# Altium PCB pcb_tigresse_experiment.PcbDoc
Units mil, origin at the board's own origin, x right, y up, seen from the top; angles counter-clockwise.
Board outline 6000 x 4000 mil, 2 copper layers (Top Layer, Bottom Layer); 37 components, 39 nets, 139 pads, 0 vias.
Unrouted connection lines stored in the file: 78.
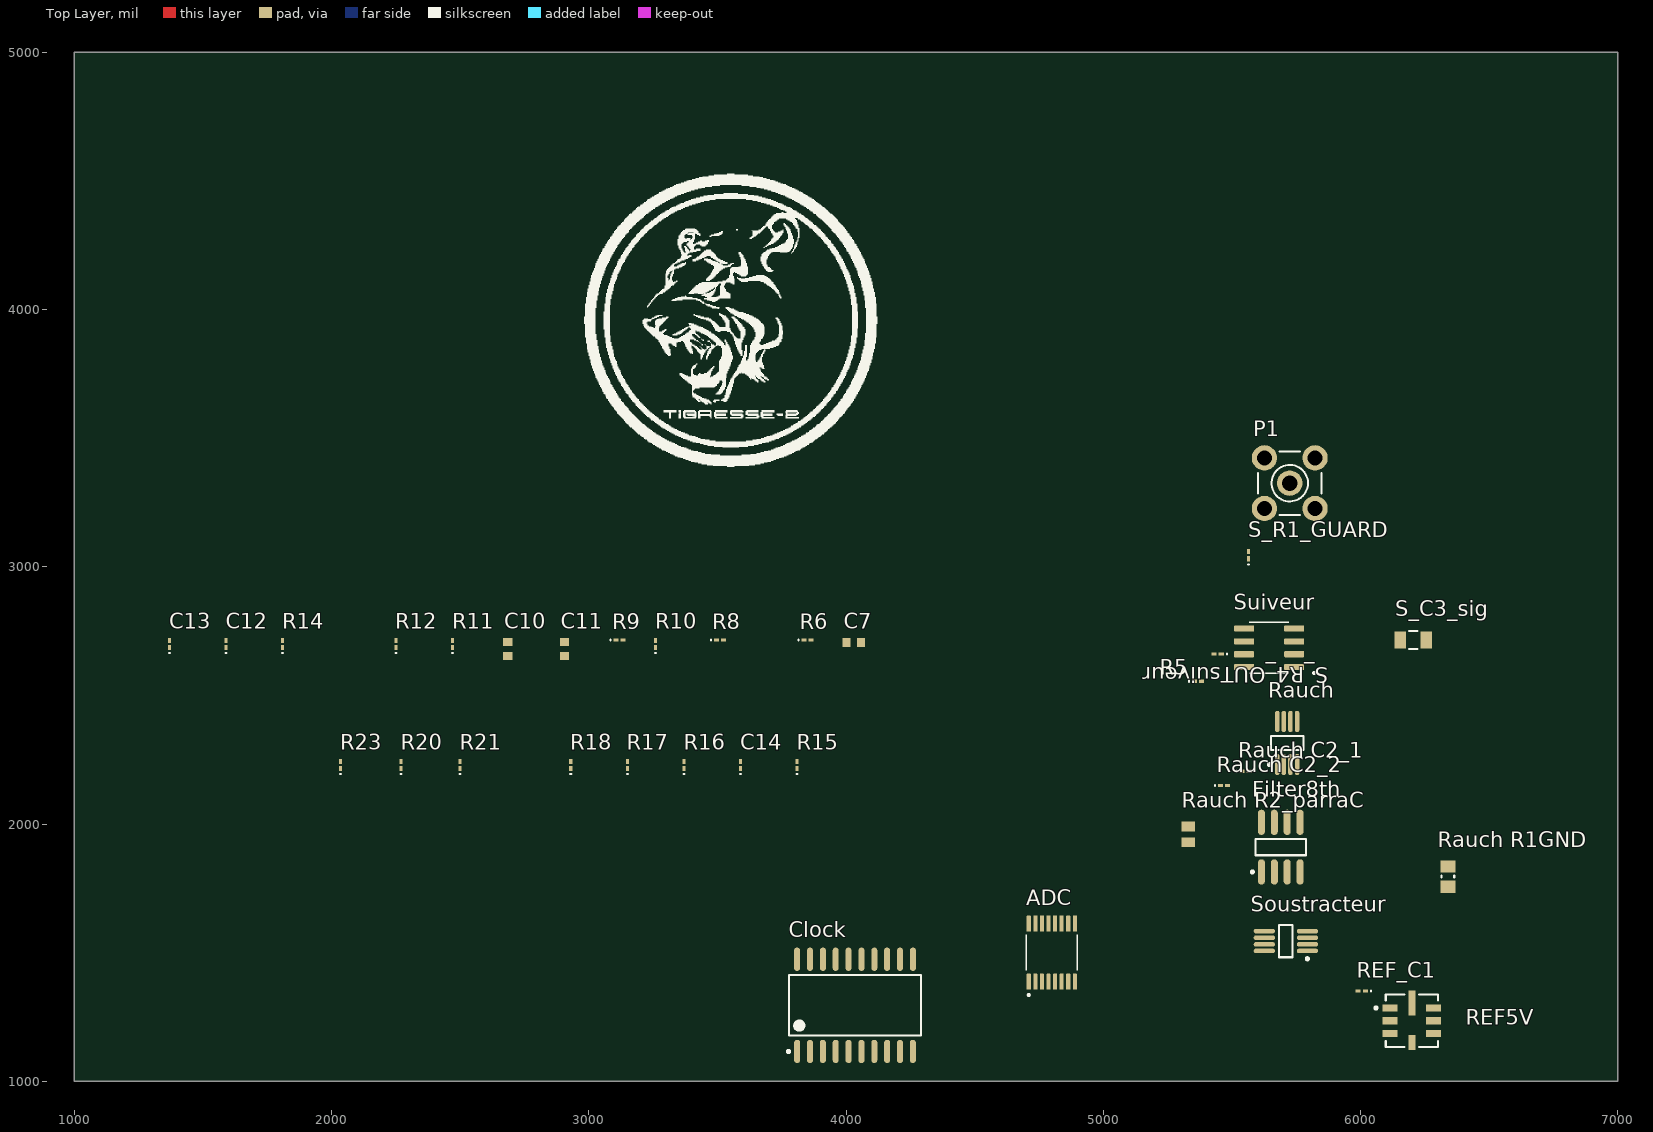
[diagram p0: Top Layer view]
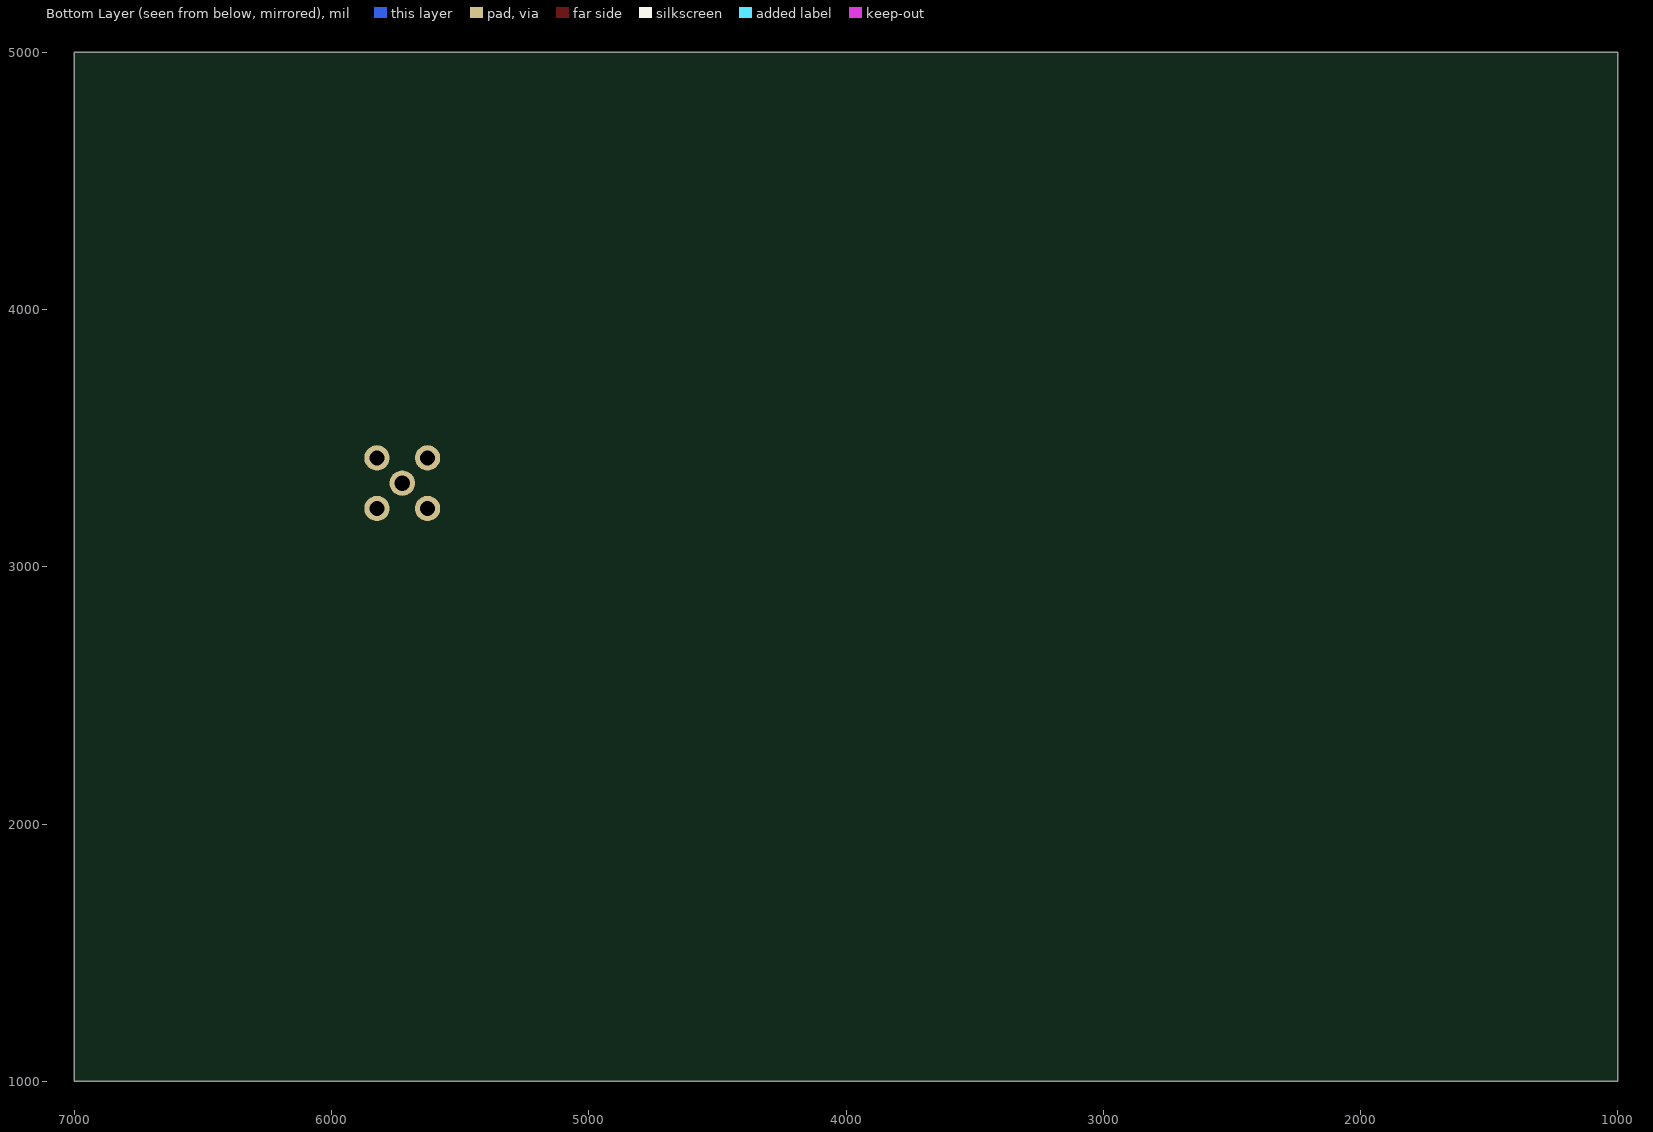
[diagram p1: Bottom Layer view, seen from below]

## Layer stack, top to bottom
Top Solder: solder mask 0.4, Solder Resist, Dk 3.5
Top Layer: signal copper 1.4
Dielectric 1: dielectric 12.6, FR-4, Dk 4.8
Bottom Layer: signal copper 1.4
Bottom Solder: solder mask 0.4, Solder Resist, Dk 3.5

## Board outline
1000,1000 7000,1000 7000,5000 1000,5000

## Design rules (kind name [scope] priority, off if disabled: settings)
Clearance [All] p1: gap=10 ignorepadtopadclearanceinfootprint=FALSE except(0: Arc-Hole Track-Hole SMDPad-Hole THPad-Hole Via-Hole Fill-Hole Poly-Hole Region-Hole Text-Hole)
PolygonConnect [All] p1: connectstyle=Relief reliefconductorwidth=10 reliefentries=4 polygonreliefangle="90 Angle" airgapwidth=10
RoutingVias [All] p1: holewidth=28 width=50 viastyle="Through Hole" minholewidth=28 minwidth=50 maxholewidth=28 maxwidth=50
SolderMaskExpansion [All] p1: expansion=4 istentingtop=FALSE
Width [All] p1: maxlimit=50 minlimit=6 preferedwidth=12 minimp=50.000000 maximp=50.000000 favimp=50.000000
30 further rules are at their usual default settings.

## Classes and differential pairs
component class Pamp: ADC C2 C4 C7 C8 C9 C10 C11 C12 C13 D1 D2 Filter8th P1 R5 R6 R8 R9 R10 R11 R12 R14 Rauch "Rauch C2_1" "Rauch C2_2" "Rauch R1GND" "Rauch R2_parraC" REF5V REF_C1 S_C3_sig S_R1_GUARD S_R4_OUTsuiveur Soustracteur Suiveur
component class Data: BT1 C14 C15 Clock D3 R15 R16 R17 R18 R20 R21 R23 U7

## Components (designator, comment, footprint, x,y, rotation, side; value= is the part's Value field where it differs from the comment)
ADC "ADS122U04IPWR" SOP65P640X120-16N 4800,1500 r90 top
C7 "NPO/25V" 1608[0603] 4030,2705 r0 top value=3.9nF
C10 "NPO/25V" 1608[0603] 2685,2680 r90 top value=2.6nF
C11 "NPO/25V" 1608[0603] 2905,2680 r90 top value=3.9nF
C12 "X7R 50V" 0603 1590,2700 r90 top value=100nF
C13 "X7R 50V" 0603 1370,2700 r90 top value=100nF
C14 "C0603" 0603 3590,2230 r90 top value=10nF/10V
Clock "DS3232SN#" W20#H2_N 4035,1295 r90 top
Filter8th "MAX295CSA" MAXM-S8-5_M 5690,1910 r90 top
P1 "SMA" SMB_V-RJ45 5725,3325 r0 top
R5 "Res CMS" 0603 5368.78,2555 r0 top value=150
R6 "" 0603 3850,2715 r0 top value=150K/1%
R8 "" 0603 3510,2715 r0 top value=100K/1%
R9 "" 0603 3120,2715 r0 top value=100K/1%
R10 "" 0603 3260,2700 r90 top value=100K/1%
R11 "" 0603 2470,2700 r90 top value=240K/1%
R12 "" 0603 2250,2700 r90 top value=270K/1%
R14 "" 0603 1810,2700 r90 top value=120K/1%
R15 "Res CMS" 0603 3810,2230 r90 top value=1M
R16 "Res CMS" 0603 3370,2230 r90 top value=91K
R17 "Res CMS" 0603 3150,2230 r90 top value=47R
R18 "Res CMS" 0603 2930,2230 r90 top value=47R
R20 "Res CMS" 0603 2270,2230 r90 top value=4K7
R21 "Res CMS" 0603 2500,2230 r90 top value=4K7
R23 "Res CMS" 0603 2035,2230 r90 top value=47R
Rauch "AD8642ARMZ" ADI-RM-8_M 5715,2315 r90 top
"Rauch C2_1" "X7R 16V" 0603 5553.78,2205 r0 top value=22nF
"Rauch C2_2" "X7R 25V" 0603 5470,2150 r0 top value=120nF
"Rauch R1GND" "RC0805FR-07100KL" RESC2013X60X35ML10T20 6340,1795.63 r90 top
"Rauch R2_parraC" "ERJ-6ENF2003V" RESC2013X70X40LL20T20 5330,1960 r90 top
REF5V "LTC6655CHLS8-4.096#PBF" FP-LS8-8-05-08-1852-MFG 6199.65,1235 r0 top
REF_C1 "X7R 50V" 0603 6005,1350 r180 top value=100nF
S_C3_sig "CL31C221JGFNNNF" FP-CL31-IPC_C 6205.25,2715 r180 top
S_R1_GUARD "Res CMS" 0603 5565,3045 r90 top value=100K
S_R4_OUTsuiveur "Res CMS" 0603 5445,2660 r180 top value=1K
Soustracteur "AD8642ARMZ" ADI-RM-8_M 5710,1545 r180 top
Suiveur "ADA4530-1" SOIC127P600X175-8N 5645,2685 r180 top

## Footprints (in the part's own frame and the unit in brackets; to place one, negate y for a bottom-side part, rotate by r counter-clockwise, add the part's x,y. Pads: shape width x height; smd on the part's side, far side on the other; paste and mask are expansions set on the pad)
0603 [mm] "Chip Inductor, Body 0.6x0.3mm, IPC High Density"
  rect 0.5x0.3 smd: 1(-0.35,0) 2(0.35,0)
  silkscreen extent -0.9,-0.05 -0.9,0.05, body extent -0.33,-0.18 0.33,0.18, height 0.55
1608[0603] [mm] "Chip Capacitor, Body 1.6x0.8mm, IPC High Density"
  rect 0.8x0.9 smd: 1(-0.7,0) 2(0.7,0)
  body extent -0.87,-0.48 0.87,0.48, height 1.3
ADI-RM-8_M [mm] "SOP, 8-Leads, Body 3x3mm, Pitch 0.65mm, IPC Low Density"
  oval 2.1x0.45 smd: 1(-2.125,0.975) 2(-2.125,0.325) 3(-2.125,-0.325) 4(-2.125,-0.975) 5(2.125,-0.975) 6(2.125,-0.325) 7(2.125,0.325) 8(2.125,0.975)
  silkscreen extent -2.25,-1.6 0.67,1.87, body extent -1.6,-1.6 1.6,1.6, height 1.1
FP-CL31-IPC_C [mil]
  rect 43.52x65.28 smd paste+0 mask+0: 1(-50.25,0) 2(50.25,0)
  silkscreen extent -17,-34 17,34, body extent -76,-38 76,38, height 10
FP-LS8-8-05-08-1852-MFG [mm]
  rect 1.5x0.7 smd paste+0 mask+0: 1(-2.15,1.27) 2(-2.15,0) 3(-2.15,-1.27) 5(2.15,-1.27) 6(2.15,0) 7(2.15,1.27)
  rect 0.7x1.5 smd paste+0 mask+0: 4(0,-2.15)
  rect 0.7x2.5 smd paste+0 mask+0: 8(0,1.75)
  silkscreen extent -3.67,-2.58 2.58,2.58, body extent -3,-3 3,3.1, height 0.25
MAXM-S8-5_M [mm] "SOIC, 8-Leads, Body 4.9x3.9mm, Pitch 1.27mm, IPC Low Density"
  oval 2.5x0.7 smd: 1(-2.45,1.905) 2(-2.45,0.635) 3(-2.45,-0.635) 4(-2.45,-1.905) 5(2.45,-1.905) 6(2.45,-0.635) 7(2.45,0.635) 8(2.45,1.905)
  silkscreen extent -2.57,-2.5 0.8,2.93, body extent -2,-2.5 2,2.5, height 1.75
RESC2013X60X35ML10T20 [mm] "Chip Resistor, 2-Leads, Body 2.1x1.35mm, IPC Low Density"
  rect 1.2x1.45 smd: 1(-1,0) 2(1,0)
  silkscreen extent -0.1,-0.63 0.1,0.63, body extent -1.05,-0.68 1.05,0.67, height 0.6
RESC2013X70X40LL20T20 [mm] "Chip Resistor, 2-Leads, Body 2.00x1.25mm, IPC High Density"
  rect 0.95x1.35 smd: 1(-0.775,0) 2(0.775,0)
  body extent -1.1,-0.72 1.1,0.72, height 0.7
SMB_V-RJ45 [mm] "Connector; SMB Straight"
  round 2.5 hole 1.5: 1(0,0) 2(-2.5,-2.5) 2(-2.5,2.5) 2(2.5,-2.5) 2(2.5,2.5)
  silkscreen extent -3.15,-3.15 3.15,3.15
SOIC127P600X175-8N [mm]
  rrect25% 1.97x0.6 smd: 1(-2.475,1.905) 2(-2.475,0.635) 3(-2.475,-0.635) 4(-2.475,-1.905) 5(2.475,-1.905) 6(2.475,-0.635) 7(2.475,0.635) 8(2.475,1.905)
  silkscreen extent -4.54,-2.52 1.95,2.6, body extent -2.45,-3 2.45,3, height 0.75
SOP65P640X120-16N [mm]
  rrect25% 1.57x0.41 smd: 1(-2.87,2.275) 2(-2.87,1.625) 3(-2.87,0.975) 4(-2.87,0.325) 5(-2.87,-0.325) 6(-2.87,-0.975) 7(-2.87,-1.625) 8(-2.87,-2.275) 9(2.87,-2.275) 10(2.87,-1.625) 11(2.87,-0.975) 12(2.87,-0.325) 13(2.87,0.325) 14(2.87,0.975) 15(2.87,1.625) 16(2.87,2.275)
  silkscreen extent -4.29,-2.5 1.77,2.5
W20#H2_N [mm] "SOIC, 20-Leads, Body 12.8x7.5mm, Pitch 1.27mm, IPC Medium Density"
  oval 2.3x0.6 smd: 1(-4.55,5.715) 2(-4.55,4.445) 3(-4.55,3.175) 4(-4.55,1.905) 5(-4.55,0.635) 6(-4.55,-0.635) 7(-4.55,-1.905) 8(-4.55,-3.175) 9(-4.55,-4.445) 10(-4.55,-5.715) 11(4.55,-5.715) 12(4.55,-4.445) 13(4.55,-3.175) 14(4.55,-1.905) 15(4.55,-0.635) 16(4.55,0.635) 17(4.55,1.905) 18(4.55,3.175) 19(4.55,4.445) 20(4.55,5.715)
  silkscreen extent -4.67,-6.5 3,6.69, body extent -3.8,-6.5 3.8,6.5, height 2.65

## Part data
ADC: Package=None, Availability=Unavailable, MP=ADS122U04IPWR, Price=None
C7 C10 C11: library part "Cap Semi", "Capacitor (Semiconductor SIM Model)", LatestRevisionDate=29-May-2009, LatestRevisionNote="IPC-7351 Footprint Added.", PackageDescription="Chip Capacitor", PackageReference=C1206, Published=8-Jun-2000, Publisher="Altium Limited"
C12 C13 "Rauch C2_1" "Rauch C2_2" REF_C1: library part "Cap CMS", "Capacitor (Semiconductor SIM Model)", LatestRevisionDate=29-May-2009, LatestRevisionNote="IPC-7351 Footprint Added.", PackageDescription="Chip Capacitor", PackageReference=C1206, Published=8-Jun-2000, Publisher="Altium Limited"
C14: "Ceramic Chip Capacitor - Standard", PackageDocument=Mar-2001, Code_IPC="1608 [0603]", Code_JEITA=0603, ComponentLink1Description="Manufacturer Link", ComponentLink1URL=http://www.kemet.com/, ComponentLink2Description=Datasheet, ComponentLink2URL=http://www.kemet.com/kemet/web/homepage/kechome.nsf/vapubfilesname/F3102TA.pdf/$file/F3102TA.pdf, DatasheetDocument=Mar-2001, LatestRevisionDate=19-Mar-2004, LatestRevisionNote="Silkscreen size reduced.", Note="Footprint corresponds to dimensions for bulk cassette packaging. This case size has tightened tolerances.", PackageReference=0603, Published=17-Jul-2002, Publisher="Altium Limited"
Clock: library part CMP-0254-00381-1, "Extremely Accurate I2C-Integrated Real-Time Clock/TCXO/Crystal and SRAM, 20-Pin SO, -40 to 85 degC, RoHS Qualified", Code_IPC=SOIC127P1030-20, Code_JEDEC=MS-013-AC, ComponentLink1Description="Manufacturer URL", ComponentLink1URL=http://www.maxim-ic.com, ComponentLink2Description=Datasheet, ComponentLink2URL=http://datasheets.maxim-ic.com/en/ds/DS3232.pdf, ComponentLink3Description="Package Specification", ComponentLink3URL=http://pdfserv.maxim-ic.com/package_dwgs/21-0042.PDF, DatasheetVersion="Rev 5, Jul-2010", PackageDescription="20-Pin Small-Outline IC, Wide (0.3in), 1.27 mm Pitch, SOIC (W), RoHS Qualified", PackageReference=W20#H2, PackageVersion="revD, 2010"
Filter8th: library part CMP-0026-00196-2, "8th-Order Switched Capacitor Lowpass Filter, Butterworth, Clock Tunable, 0 to 70 degC, 8-Pin SOIC (S8-5)", Generic Part Number=MAX295, Code_JEDEC=MS012, ComponentLink1Description="Manufacturer URL", ComponentLink1URL=http://www.maximintegrated.com/, ComponentLink2Description=Datasheet, ComponentLink2URL=http://datasheets.maximintegrated.com/en/ds/MAX291-MAX296.pdf, ComponentLink3Description="Package Specification", ComponentLink3URL=http://pdfserv.maximintegrated.com/package_dwgs/21-0041.PDF, DatasheetVersion="Rev. 5", Filter Characteristic=Butterworth, Filter Class="Switched Cap", Filter Sections=1, Filter Type=Lowpass, Mounting Technology="Surface Mount", Order Per Filter Section=8, PackageDescription="8-Pin Small-Outline IC, Narrow (0.15in) (S8-5), Body 4.90 x 3.90 mm, Pitch 1.27 mm", PackageReference=S8-5, PackageVersion="Rev. D, 10/2012", PartNumber=MAX295CSA, Program Method=Clock
P1: library part SMB, "SMA 90deg ConnectorR125680000", LatestRevisionDate=17-Jul-2002, LatestRevisionNote="Re-released for DXP Platform.", Publisher="Altium Limited"
R5 R15 R16 R17 R18 R20 R21 R23 S_R1_GUARD S_R4_OUTsuiveur: "Resistor", LatestRevisionDate=17-Jul-2002, LatestRevisionNote="Re-released for DXP Platform.", PackageDescription="Axial Device, Thru-Hole; 2 Leads; 0.3 in Pin Spacing", PackageReference=AXIAL-0.3, Published=8-Jun-2000, Publisher="Altium Limited"
R6 R8 R9 R10 R11 R12 R14: library part "Res CMS", "Resistor", LatestRevisionDate=17-Jul-2002, LatestRevisionNote="Re-released for DXP Platform.", PackageDescription="Axial Device, Thru-Hole; 2 Leads; 0.3 in Pin Spacing", PackageReference=AXIAL-0.3, Published=8-Jun-2000, Publisher="Altium Limited"
Rauch Soustracteur: library part CMP-0384-01629-1, "Double Channel Very Low Input Bias Current Operational Amplifier, 3.5 MHz BW, 3 V/us SR, Industrial, 8-pin SOP (RM-8), Tube", Amplifiers Per Package=2, Generic Part Number=AD8642, Input Bias Current=250fA, Input Offset Voltage=50uV, Manufacturer="Analog Devices", Code_JEDEC=MO-187-AA, ComponentLink1Description="Manufacturer URL", ComponentLink1URL=http://www.analog.com/en/index.html, ComponentLink2Description=Datasheet, ComponentLink2URL=http://www.analog.com/static/imported-files/data_sheets/AD8641_8642_8643.pdf, ComponentLink3Description="Package Specification", ComponentLink3URL=http://www.analog.com/static/imported-files/packages/PKG_PDF/MSOP%28RM%29/RM_8.pdf, DatasheetVersion="Rev. E", Iq/Amp=290uA, Mounting Technology="Surface Mount", PackageDescription="8-Pin Mini Small Outline Package, Body 3 x 3 mm, Pitch 0.65 mm", PackageReference=RM-8, PartNumber=AD8642ARMZ, Slew Rate=3V/us, Small Signal Bandwidth=3.5MHz, V Span Max=26V, V Span Min=5V
"Rauch R1GND": library part CMP-2100-03668-1, "Chip Resistor, 100 KOhm, +/- 1%, 0.125 W, -55 to 155 degC, 0805 (2012 Metric), RoHS, Tape and Reel", Case Code (Imperial)=0805, Case Code (Metric)=2012, Manufacturer=Yageo, Max Operating Temperature=155degC, Max Power Dissipation=125mW, Min Operating Temperature=-55degC, Package Description="2-Pin Surface Mounted Device, Body 2 x 1.25 mm", Package Quantity=1, Resistance=100KOhm, Temperature Coefficient=100ppm/degreesC, Tolerance=1%, Voltage Rating=150V, Case/Package=0805, Composition=ThickFilm, Datasheet URL=http://www.yageo.com/NewPortal/yageodocoutput?fileName=/pdf/R-Chip/PYu-RC_Group_51_RoHS_L_5.pdf, Datasheet Version="Rev. 5, 10/2016", Depth=1.25mm, Height=0.024inch, Lead Free=LeadFree, Lead Pitch=0.4mm, Length=2mm, Manufacturer URL=http://www.yageo.com/, Military Standard=Not, Number of Pins=2, Number of Terminations=2, Package Reference=0805, Packaging=TapeandReel, Power Rating=125mW, REACH SVHC=Unknown, RoHSCompliant=true, Termination=SMD/SMT, Voltage Rating (DC)=150V, Width=0.049inch
"Rauch R2_parraC": library part CMP-2001-00028-1, Manufacturer=Panasonic, Part Number=ERJ-6ENF2003V
REF5V: library part CMP-09137-000020-1, "IC VREF SERIES 0.05% 8CLCC", Case/Package=CLCC, Max Operating Temperature=125°C, Min Operating Temperature=-40°C, Min Output Voltage=4.096V, Operating Supply Current=7.5mA, Output Current=5mA, Package Quantity=576, Temperature Coefficient=5ppm/°C, Tolerance=0.05%, Mount="Surface Mount", Number of Pins=8, Output Type=Fixed, Packaging=Tray, REACH SVHC="No SVHC", Reference Type=Series, Reference Voltage=4.096V, RoHS Compliant=Yes
S_C3_sig: library part CMP-13271-001211-1, "Cap Ceramic 220pF 500V C0G ±5% SMD 1206 +125°C Embossed T/R", Capacitance=220pF, Case/Package=1206, Dielectric=C0G, Max Operating Temperature=125°C, Min Operating Temperature=-55°C, Package Quantity=10000, Tolerance=5%, Voltage Rating=500V, Depth=1.6mm, Height=1.25mm, Length=3.2mm, Mount="Surface Mount", Packaging="Tape and Reel", Radiation Hardening=No, Thickness=0.055inch, Voltage Rating (DC)=500V, Width=0.063inch

## Nets (pads, with @x,y where several pads share a name; then routed paths per layer and width w, separated by ;. In a path a pad name is that pad's centre, name@x,y a point inside that pad or via, vN(x,y) a via of type N, cw(c..) or ccw(c..) an arc to the next point about the centre after c; other vN are vias at no path point)
+VALIM: R15.2
A+5V: ADC.12 C13.2 Filter8th.7 Rauch.8 Soustracteur.8
A-5V: C12.2 Filter8th.2 Rauch.4
AC: ADC.11 R6.2 Soustracteur.1
AGND: "Rauch R1GND.1" ADC.1 ADC.2 ADC.4 ADC.5 ADC.6 ADC.8 ADC.10 C7.1 C10.2 C12.1 C13.1 Filter8th.6 R14.2 Rauch.3 REF5V.3 REF5V.4 REF5V.5 REF5V.8 REF_C1.1 S_C3_sig.2 Soustracteur.4
D3V3: ADC.3 ADC.13 Clock.4 R20.1 R21.1
DGND: C14.1 Clock.15 R16.2
GUARD: S_R1_GUARD.1 Suiveur.1 Suiveur.2 Suiveur.7
GUARD_EXT: P1.1 S_R1_GUARD.2
HKVBAT: C14.2 R15.1 R16.1
MON_SWPWR: 
NetADC_14: ADC.14 R23.1
NetADC_15: ADC.15 R18.1
NetADC_16: ADC.16 R17.1
NetBatt_clock_1: Clock.16
NetC7_2: C7.2 R8.2 R9.2 R10.2
NetC10_1: C10.1 Filter8th.1
NetC11_1: C11.1 Filter8th.4 R10.1
NetC11_2: C11.2 Filter8th.3 R8.1 R11.2
NetClock_17: Clock.17 R21.2
NetClock_18: Clock.18 Clock.20 R20.2
NetD1_1: 
NetFilter8th_5: Filter8th.5 R9.1
NetFilter8th_8: "Rauch C2_1.1" "Rauch C2_2.1" "Rauch R2_parraC.2" Filter8th.8 Rauch.1
NetR5_1: R5.1 Suiveur.8
NetR6_1: R6.1 R11.1 Soustracteur.2
NetR12_1: R12.1 R14.1 Soustracteur.3
NetR17_2: R17.2
NetR18_2: R18.2
NetR23_2: R23.2
"NetRauch C1_1": "Rauch C2_1.2" "Rauch C2_2.2" "Rauch R1GND.2"
"NetRauch C2_3_1": "Rauch R2_parraC.1" Rauch.2
NetS_R4_OUTsuiveur_1: S_R4_OUTsuiveur.1 Suiveur.6
PWR_ON: 
REF5V: ADC.9 R12.2 REF5V.6 REF5V.7
REFALIM: REF5V.1 REF5V.2 REF_C1.2
SIG: R5.2 S_C3_sig.1 S_R4_OUTsuiveur.2
V+: Suiveur.5
V-: Suiveur.3 Suiveur.4
pads on no net: ADC.7 Clock.1 Clock.2 Clock.3 Clock.5 Clock.6 Clock.7 Clock.8 Clock.9 Clock.10 Clock.11 Clock.12 Clock.13 Clock.14 Clock.19 P1.2 Rauch.5 Rauch.6 Rauch.7 Soustracteur.5 Soustracteur.6 Soustracteur.7

## Silkscreen, mask and mechanical layers (free items; w line width, h text height)
Top Overlay:
  drawing of 53 lines, arcs and shapes, not listed